# EAGLE board button_breakout_v1.0 (EAGLE 9.6.2)
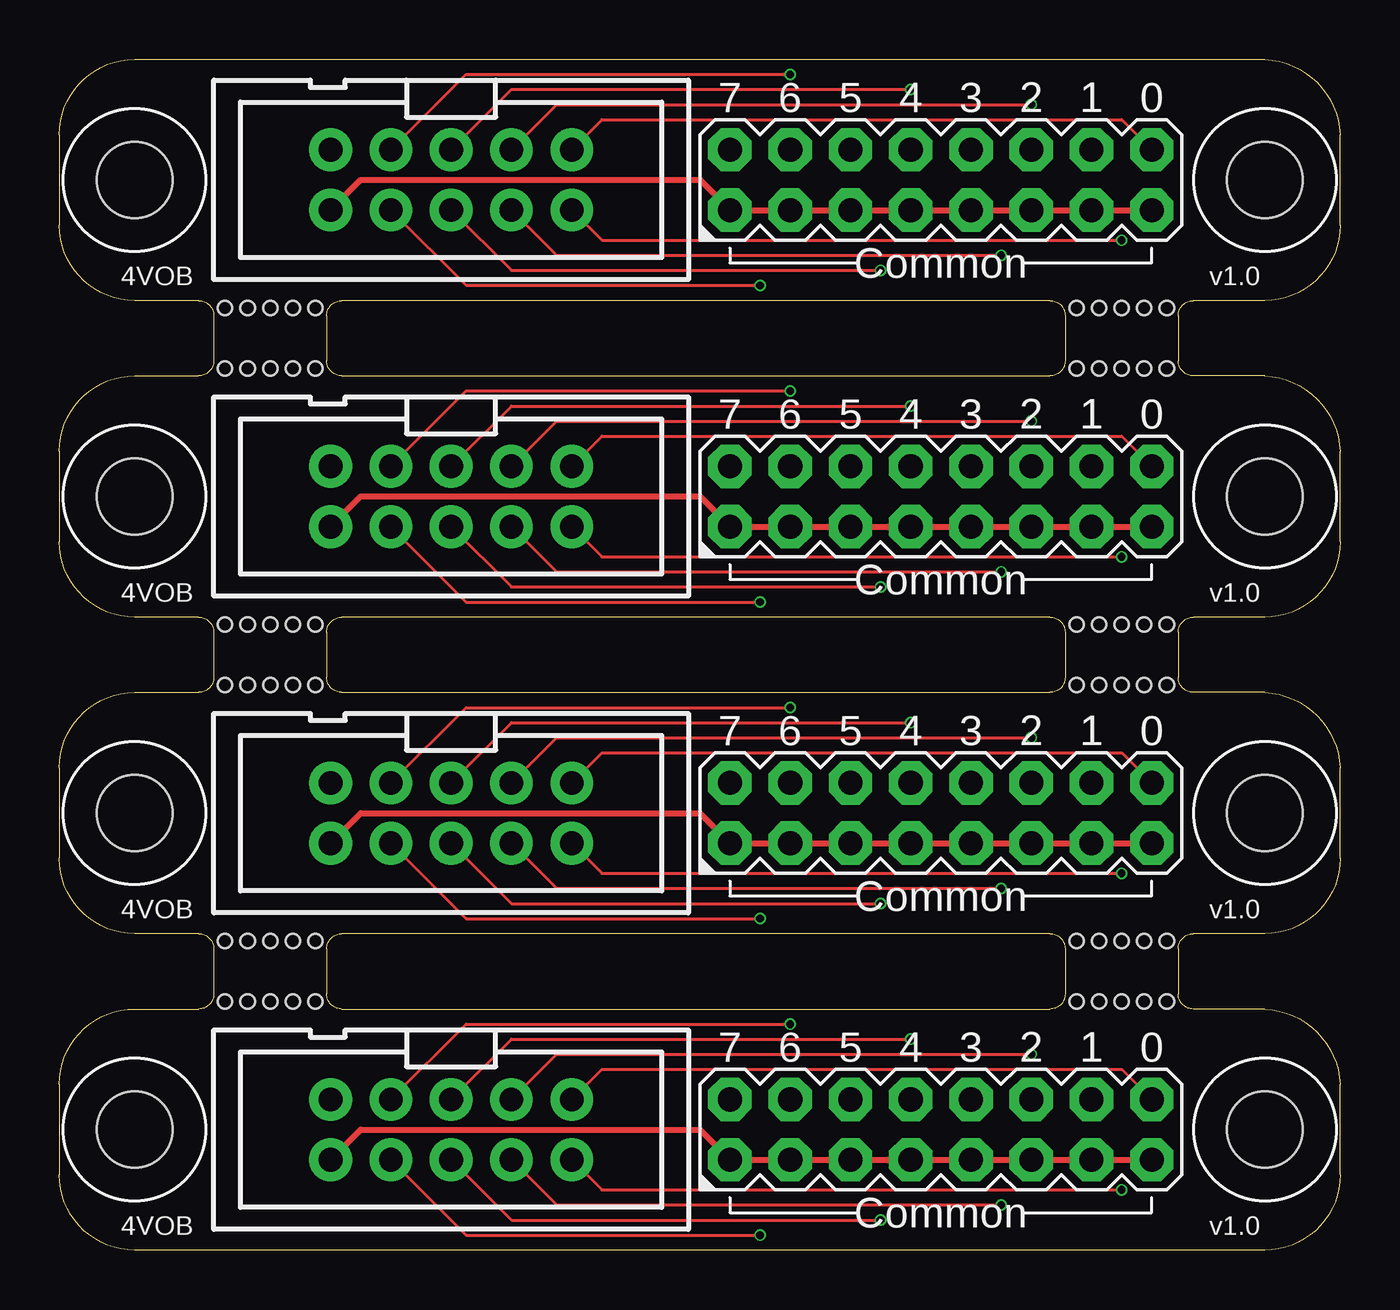
[diagram p0: board, top side]
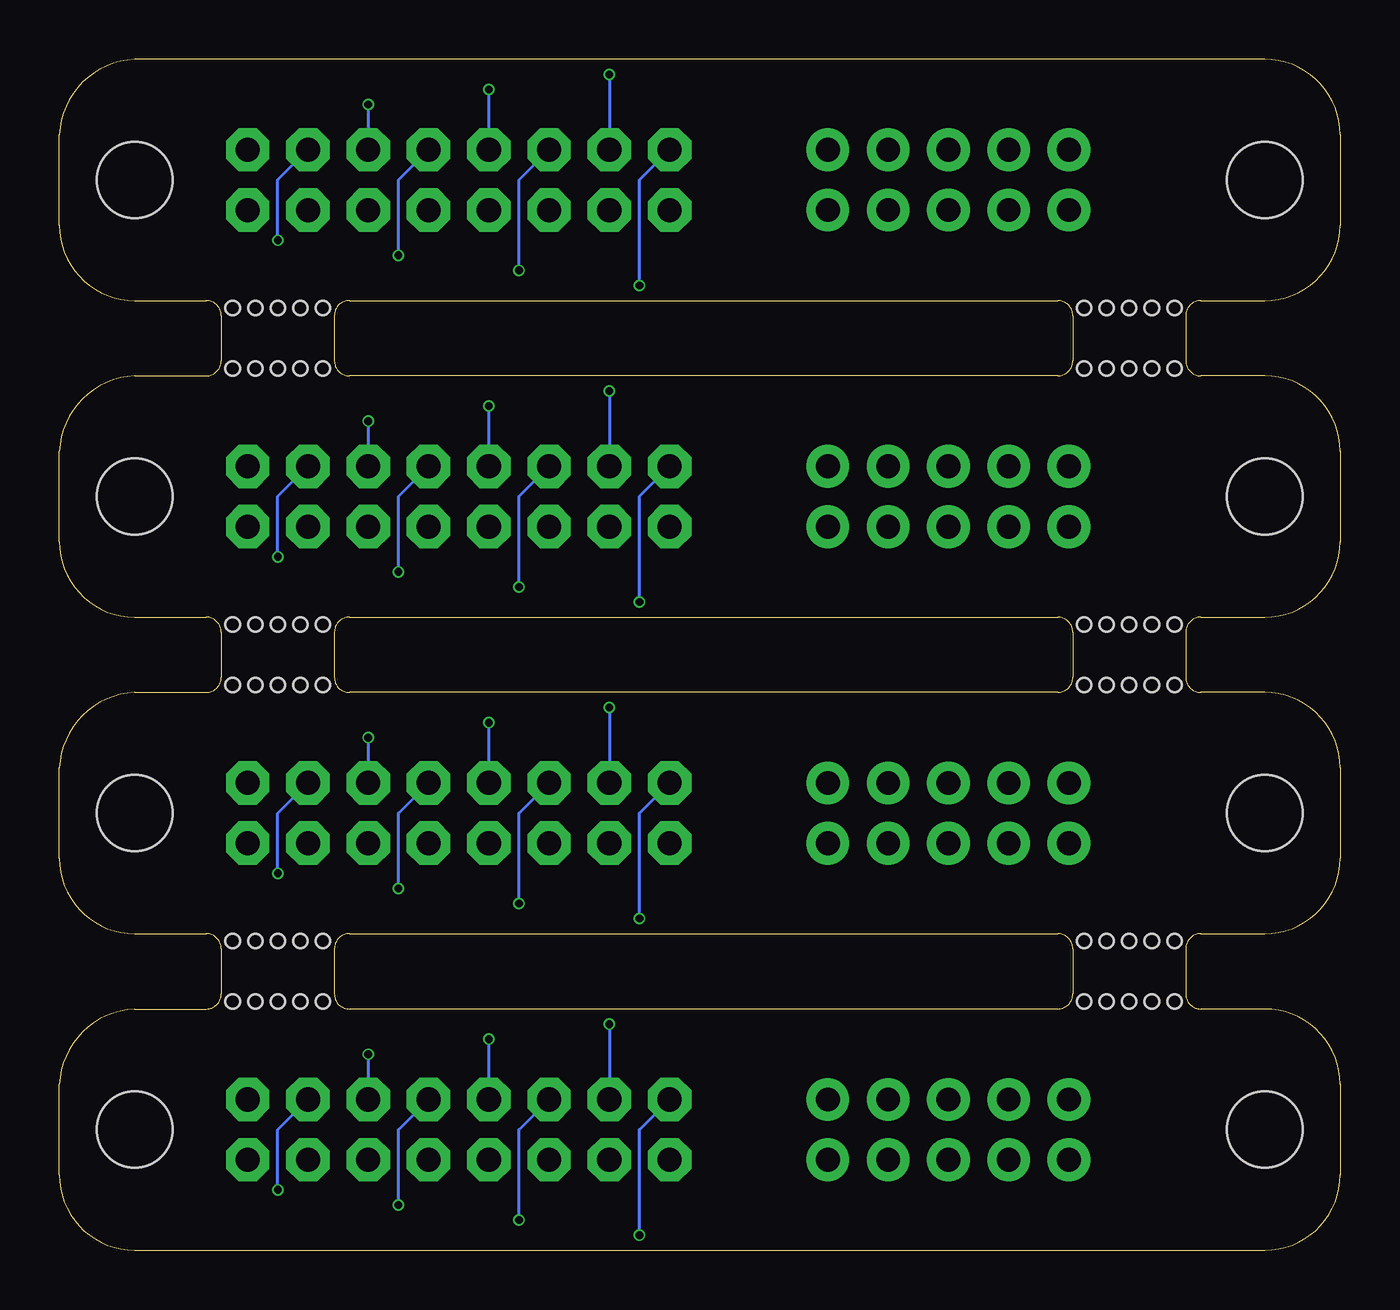
[diagram p1: board, bottom side, seen from below]

Size 53.98 x 50.16 mm. Coordinates in mm from the lower left corner, seen from the top.
Outline: 53.98,3.17 53.98,6.99 arc85 50.8,10.16 47.78,10.16 arc-90 47.15,10.79 47.15,12.7 arc-90 47.78,13.34 50.8,13.34 arc90 53.98,16.51 53.98,20.32 arc85 50.8,23.5 47.78,23.5 arc-90 47.15,24.13 47.15,26.04 arc-90 47.78,26.67 50.8,26.67 arc90 53.98,29.84 53.98,33.66 arc85 50.8,36.83 47.78,36.83 arc-90 47.15,37.47 47.15,39.37 arc-90 47.78,40.01 50.8,40.01 arc90 53.98,43.18 53.98,46.99 arc85 50.8,50.16 3.17,50.16 arc90 0,46.99 0,43.18 arc90 3.17,40.01 5.87,40.01 arc-90 6.51,39.37 6.51,37.47 arc-90 5.87,36.83 3.17,36.83 arc90 0,33.66 0,29.84 arc90 3.17,26.67 5.87,26.67 arc-90 6.51,26.04 6.51,24.13 arc-90 5.87,23.5 3.17,23.5 arc90 0,20.32 0,16.51 arc90 3.17,13.34 5.87,13.34 arc-90 6.51,12.7 6.51,10.79 arc-90 5.87,10.16 3.17,10.16 arc90 0,6.99 0,3.17 arc90 3.17,0 50.8,0 arc90 53.98,3.17
Outline: 42.39,10.79 arc-90 41.75,10.16 11.91,10.16 arc-90 11.27,10.79 11.27,12.7 arc-90 11.91,13.34 41.75,13.34 arc-90 42.39,12.7 42.39,10.79
Outline: 42.39,24.13 arc-90 41.75,23.5 11.91,23.5 arc-90 11.27,24.13 11.27,26.04 arc-90 11.91,26.67 41.75,26.67 arc-90 42.39,26.04 42.39,24.13
Outline: 42.39,37.47 arc-90 41.75,36.83 11.91,36.83 arc-90 11.27,37.47 11.27,39.37 arc-90 11.91,40.01 41.75,40.01 arc-90 42.39,39.37 42.39,37.47
Copper layers (1*16): Top 0.035mm / dielectric 1.6mm / Bottom 0.035mm
Design rules "jlcpcb-2layers": minimum track width 5mil, minimum drill 0.3mm, track to track 5mil, track to pad 5mil, pad to pad 5mil, via to via 5mil, smd to smd 5mil, copper to edge 0.2mm, drill to drill 6mil, minimum pad ring 10mil, minimum via ring 3mil, stop-mask expansion 4mil, vias tented up to drill 0mil, thermal gap 10mil
Holes 3.2 mm at 3.17,5.08 50.8,5.08 3.17,18.41 50.8,18.41 3.17,31.75 50.8,31.75 3.17,45.09 50.8,45.09
Holes 0.6 mm at 46.67,10.48 45.72,10.48 44.77,10.48 43.81,10.48 42.86,10.48 42.86,13.02 43.81,13.02 44.77,13.02 45.72,13.02 46.67,13.02 10.79,10.48 9.84,10.48 8.89,10.48 7.94,10.48 6.99,10.48 6.99,13.02 7.94,13.02 8.89,13.02 9.84,13.02 10.79,13.02 46.67,23.81 45.72,23.81 44.77,23.81 43.81,23.81 42.86,23.81 42.86,26.35 43.81,26.35 44.77,26.35 45.72,26.35 46.67,26.35 10.79,23.81 9.84,23.81 8.89,23.81 7.94,23.81 6.99,23.81 6.99,26.35 7.94,26.35 8.89,26.35 9.84,26.35 10.79,26.35 46.67,37.15 45.72,37.15 44.77,37.15 43.81,37.15 42.86,37.15 42.86,39.69 43.81,39.69 44.77,39.69 45.72,39.69 46.67,39.69 10.79,37.15 9.84,37.15 8.89,37.15 7.94,37.15 6.99,37.15 6.99,39.69 7.94,39.69 8.89,39.69 9.84,39.69 10.79,39.69

## Footprints (pad centres in the part's own frame; a part is rotated, then mirrored left to right if it is on the bottom)
CONN-IDC10P-S = drill 1 pad 1.422: 1 -5.08,-1.27; 2 -5.08,1.27; 3 -2.54,-1.27; 4 -2.54,1.27; 5 0,-1.27; 6 0,1.27; 7 2.54,-1.27; 8 2.54,1.27; 9 5.08,-1.27; 10 5.08,1.27
MA08-2J = drill 1.016 octagon: 1 -8.89,-1.27; 2 -8.89,1.27; 3 -6.35,-1.27; 4 -6.35,1.27; 5 -3.81,-1.27; 6 -3.81,1.27; 7 -1.27,-1.27; 8 -1.27,1.27; 9 1.27,-1.27; 10 1.27,1.27; 11 3.81,-1.27; 12 3.81,1.27; 13 6.35,-1.27; 14 6.35,1.27; 15 8.89,-1.27; 16 8.89,1.27

## Placement (x,y rotation side)
IDC  CONN-IDC-10PS  [CONN-IDC10P-S]  16.51,5.08 180 top
IDC1  CONN-IDC-10PS  [CONN-IDC10P-S]  16.51,18.41 180 top
IDC2  CONN-IDC-10PS  [CONN-IDC10P-S]  16.51,31.75 180 top
IDC3  CONN-IDC-10PS  [CONN-IDC10P-S]  16.51,45.09 180 top
X1  [MA08-2J]  37.15,5.08 0 top
X2  [MA08-2J]  37.15,18.41 0 top
X3  [MA08-2J]  37.15,31.75 0 top
X4  [MA08-2J]  37.15,45.09 0 top

## Library data of the parts
IDC IDC1-IDC3 = joakim
X1-X4 = joakim; OC_FARNELL: unknown; OC_NEWARK: unknown

## Nets
COL0: IDC.1 X1.16
COL1: IDC.2 X1.14
COL2: IDC.3 X1.12
COL3: IDC.4 X1.10
COL4: IDC.5 X1.8
COL5: IDC.6 X1.6
COL6: IDC1.2 X2.14
COL7: IDC.8 X1.2
COL8: IDC1.3 X2.12
COL9: IDC1.4 X2.10
COL10: IDC1.5 X2.8
COL11: IDC1.6 X2.6
COL12: IDC1.8 X2.2
COL13: IDC1.1 X2.16
COL14: IDC1.7 X2.4
COL15: IDC2.2 X3.14
COL16: IDC.7 X1.4
COL17: IDC2.3 X3.12
COL18: IDC2.4 X3.10
COL19: IDC2.5 X3.8
COL20: IDC2.6 X3.6
COL21: IDC2.8 X3.2
COL22: IDC2.1 X3.16
COL23: IDC2.7 X3.4
COL24: IDC3.2 X4.14
COL25: IDC3.3 X4.12
COL26: IDC3.4 X4.10
COL27: IDC3.5 X4.8
COL28: IDC3.6 X4.6
COL29: IDC3.8 X4.2
COL30: IDC3.1 X4.16
COL31: IDC3.7 X4.4
ROW0: IDC.10 X1.1 X1.3 X1.5 X1.7 X1.9 X1.11 X1.13 X1.15
ROW1: IDC1.10 X2.1 X2.3 X2.5 X2.7 X2.9 X2.11 X2.13 X2.15
ROW2: IDC2.10 X3.1 X3.3 X3.5 X3.7 X3.9 X3.11 X3.13 X3.15
ROW3: IDC3.10 X4.1 X4.3 X4.5 X4.7 X4.9 X4.11 X4.13 X4.15

## Tracks (layer width: path | path; a pad name or v marks a point on that pad's centre or on a via)
COL0
  Top 0.127: IDC.1 22.86,7.62 44.77,7.62 X1.16
COL1  (via drill 0.33)
  Top 0.127: IDC.2 22.86,2.54 v44.77,2.54
  Bottom 0.127: v44.77,2.54 44.77,5.08 X1.14
COL2  (via drill 0.33)
  Top 0.127: IDC.3 20.95,8.26 v40.96,8.26
  Bottom 0.127: v40.96,8.26 X1.12
COL3  (via drill 0.33)
  Top 0.127: IDC.4 20.95,1.91 v39.69,1.91
  Bottom 0.127: v39.69,1.91 39.69,5.08 X1.10
COL4  (via drill 0.33)
  Top 0.127: IDC.5 19.05,8.89 v35.88,8.89
  Bottom 0.127: v35.88,8.89 X1.8
COL5  (via drill 0.33)
  Top 0.127: IDC.6 19.05,1.27 v34.61,1.27
  Bottom 0.127: v34.61,1.27 34.61,5.08 X1.6
COL6  (via drill 0.33)
  Top 0.127: IDC1.2 22.86,15.88 v44.77,15.88
  Bottom 0.127: v44.77,15.88 44.77,18.41 X2.14
COL7  (via drill 0.33)
  Top 0.127: IDC.8 17.14,0.64 v29.53,0.64
  Bottom 0.127: v29.53,0.64 29.53,5.08 X1.2
COL8  (via drill 0.33)
  Top 0.127: IDC1.3 20.95,21.59 v40.96,21.59
  Bottom 0.127: v40.96,21.59 X2.12
COL9  (via drill 0.33)
  Top 0.127: IDC1.4 20.95,15.24 v39.69,15.24
  Bottom 0.127: v39.69,15.24 39.69,18.41 X2.10
COL10  (via drill 0.33)
  Top 0.127: IDC1.5 19.05,22.23 v35.88,22.23
  Bottom 0.127: v35.88,22.23 X2.8
COL11  (via drill 0.33)
  Top 0.127: IDC1.6 19.05,14.61 v34.61,14.61
  Bottom 0.127: v34.61,14.61 34.61,18.41 X2.6
COL12  (via drill 0.33)
  Top 0.127: IDC1.8 17.14,13.97 v29.53,13.97
  Bottom 0.127: v29.53,13.97 29.53,18.41 X2.2
COL13
  Top 0.127: IDC1.1 22.86,20.95 44.77,20.95 X2.16
COL14  (via drill 0.33)
  Top 0.127: IDC1.7 17.14,22.86 v30.8,22.86
  Bottom 0.127: v30.8,22.86 X2.4
COL15  (via drill 0.33)
  Top 0.127: IDC2.2 22.86,29.21 v44.77,29.21
  Bottom 0.127: v44.77,29.21 44.77,31.75 X3.14
COL16  (via drill 0.33)
  Top 0.127: IDC.7 17.14,9.53 v30.8,9.53
  Bottom 0.127: v30.8,9.53 X1.4
COL17  (via drill 0.33)
  Top 0.127: IDC2.3 20.95,34.92 v40.96,34.92
  Bottom 0.127: v40.96,34.92 X3.12
COL18  (via drill 0.33)
  Top 0.127: IDC2.4 20.95,28.57 v39.69,28.57
  Bottom 0.127: v39.69,28.57 39.69,31.75 X3.10
COL19  (via drill 0.33)
  Top 0.127: IDC2.5 19.05,35.56 v35.88,35.56
  Bottom 0.127: v35.88,35.56 X3.8
COL20  (via drill 0.33)
  Top 0.127: IDC2.6 19.05,27.94 v34.61,27.94
  Bottom 0.127: v34.61,27.94 34.61,31.75 X3.6
COL21  (via drill 0.33)
  Top 0.127: IDC2.8 17.14,27.3 v29.53,27.3
  Bottom 0.127: v29.53,27.3 29.53,31.75 X3.2
COL22
  Top 0.127: IDC2.1 22.86,34.29 44.77,34.29 X3.16
COL23  (via drill 0.33)
  Top 0.127: IDC2.7 17.14,36.2 v30.8,36.2
  Bottom 0.127: v30.8,36.2 X3.4
COL24  (via drill 0.33)
  Top 0.127: IDC3.2 22.86,42.55 v44.77,42.55
  Bottom 0.127: v44.77,42.55 44.77,45.09 X4.14
COL25  (via drill 0.33)
  Top 0.127: IDC3.3 20.95,48.26 v40.96,48.26
  Bottom 0.127: v40.96,48.26 X4.12
COL26  (via drill 0.33)
  Top 0.127: IDC3.4 20.95,41.91 v39.69,41.91
  Bottom 0.127: v39.69,41.91 39.69,45.09 X4.10
COL27  (via drill 0.33)
  Top 0.127: IDC3.5 19.05,48.9 v35.88,48.9
  Bottom 0.127: v35.88,48.9 X4.8
COL28  (via drill 0.33)
  Top 0.127: IDC3.6 19.05,41.27 v34.61,41.27
  Bottom 0.127: v34.61,41.27 34.61,45.09 X4.6
COL29  (via drill 0.33)
  Top 0.127: IDC3.8 17.14,40.64 v29.53,40.64
  Bottom 0.127: v29.53,40.64 29.53,45.09 X4.2
COL30
  Top 0.127: IDC3.1 22.86,47.62 44.77,47.62 X4.16
COL31  (via drill 0.33)
  Top 0.127: IDC3.7 17.14,49.53 v30.8,49.53
  Bottom 0.127: v30.8,49.53 X4.4
ROW0
  Top 0.254: IDC.10 12.7,5.08 26.99,5.08 X1.1 X1.3 X1.5 X1.7 X1.9 X1.11 X1.13 X1.15
ROW1
  Top 0.254: IDC1.10 12.7,18.41 26.99,18.41 X2.1 X2.3 X2.5 X2.7 X2.9 X2.11 X2.13 X2.15
ROW2
  Top 0.254: IDC2.10 12.7,31.75 26.99,31.75 X3.1 X3.3 X3.5 X3.7 X3.9 X3.11 X3.13 X3.15
ROW3
  Top 0.254: IDC3.10 12.7,45.09 26.99,45.09 X4.1 X4.3 X4.5 X4.7 X4.9 X4.11 X4.13 X4.15

## Text on the board
tNames: 7 | 6 | 5 | 4 | 3 | 2 | 1 | 0 | 4VOB | Common | v1.0 | 7 | 6 | 5 | 4 | 3 | 2 | 1 | 0 | Common | 4VOB | v1.0 | 7 | 6 | 5 | 4 | 3 | 2 | 1 | 0 | 4VOB | Common | v1.0 | 7 | 6 | 5 | 4 | 3 | 2 | 1 | 0 | 4VOB | Common | v1.0